# Allegro board PositionDecion_ZM_V1.brd
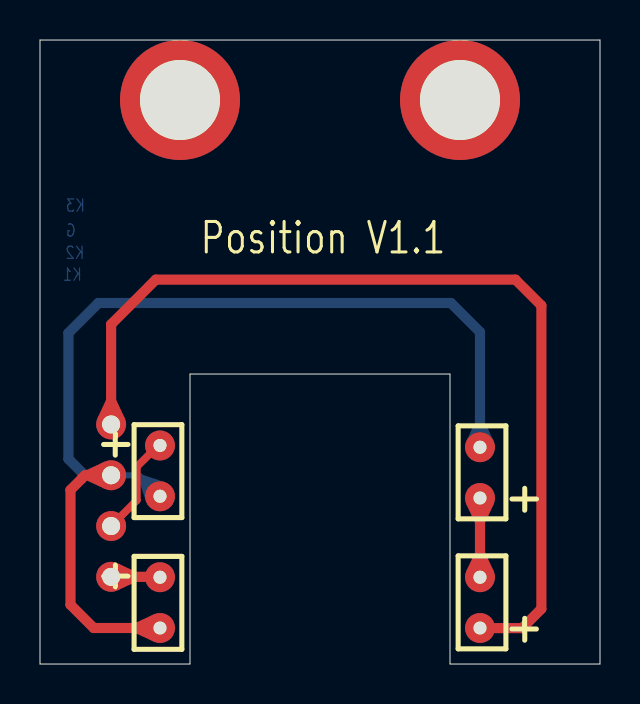
[diagram p0: board, top side]
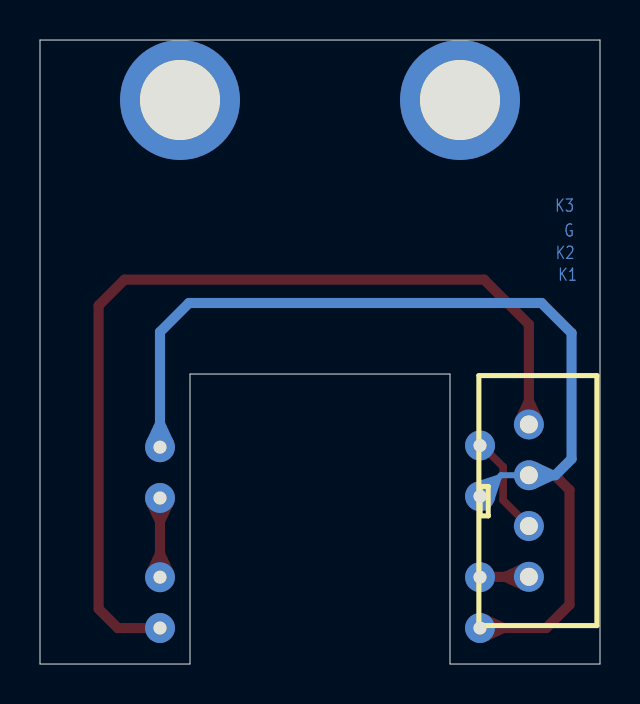
[diagram p1: board, bottom side, seen from below]

Outline 28 x 31.2 mm; copper layers: TOP, BOTTOM. Coordinates in mm from the lower left corner of the outline.
Outline path: 0,31.2 0,0 7.5,0 7.5,14.5 20.5,14.5 20.5,0 28,0 28,31.2 0,31.2

## Placement (name value [footprint] x y rotation side)
J1  -  [XH_2_54_4P]  3.56 4.36 90 bottom
Q1  .10  [LED_2_54]  22 1.8 90 top
Q2  .10  [LED_2_54]  6 10.93 270 top
Q3  .10  [LED_2_54]  22 8.3 90 top
Q4  .10  [LED_2_54]  6 4.34 270 top
Q5  -  [M4]  7 28.2 0 top
Q6  -  [M4]  21 28.2 0 top

## Library data of the parts
J1 = CON4
Q1 Q3 = IR928-6C-F
Q2 Q4 = QT523C-EE1
Q5 Q6 = M4

## Footprints (pads in the part's own frame, mm; a bottom-side part is the same pattern mirrored in y, then rotated)
LED_2_54
  round 1.5 hole 0.65: 1(0,0) 2(2.54,0)
M4
  round 6 hole 4 unplated: (0,0)
XH_2_54_4P
  round 1.5 hole 0.9: 1(0,0) 2(2.54,0) 3(5.08,0) 4(7.62,0)

## Nets
GND: J1.3 Q2.2 Q3.2 Q4.2
$$$12107: Q1.2 Q3.1
LED_K1: J1.1 Q4.1
LED_K2: J1.2 Q2.1
LED_K3: J1.4 Q1.1

## Routing (per net, layer and track width the routed paths; a pad name or vN(x,y) marks a point on that pad's centre or on a via; arc(x,y) is an arc through that point)
GND: length 52.2
  TOP w0.508: Q4.2 2.69,1.8 1.52,2.96 1.52,8.7 2.08,9.26 2.08,9.27 2.25,9.44 J1.3
  BOTTOM w0.305: Q2.2 4.95,9.44 J1.3
  BOTTOM w0.508: Q3.2 22,16.6 20.55,18.05 2.92,18.05 1.42,16.55 1.42,10.25 2.24,9.44 J1.3
$$$12107: length 4
  TOP w0.508: Q1.2 Q3.1
LED_K1: length 2.4
  TOP w0.508: J1.1 5.74,4.36 Q4.1
LED_K2: length 5.1
  TOP w0.381: J1.2 4.84,8.19 4.84,9.86 5.91,10.93 Q2.1
LED_K3: length 46.6
  TOP w0.508: Q1.1 22.36,1.8 22.36,1.79 24.1,1.79 25.07,2.76 25.07,17.92 23.77,19.22 5.79,19.22 3.56,16.98 J1.4

## Copper pours and planes (outline as drawn; the poured copper is in the pictures)
GND on TOP (solid shape): 3.62,9.44 3.24,8.76 2.28,9.21 2.13,9.44 2.28,9.67 3.24,10.12
GND on TOP (solid shape): 6.06,1.8 5.68,1.12 4.72,1.57 4.57,1.8 4.72,2.03 5.68,2.48
GND on BOTTOM (solid shape): 4.92,9.27 4.96,9.42 5.12,9.46 6.23,9.1 6.03,8.36 5.29,8.15
GND on BOTTOM (solid shape): 3.62,9.44 3.24,8.76 2.28,9.21 2.13,9.44 2.28,9.67 3.24,10.12
GND on BOTTOM (solid shape): 21.77,12.12 22,12.27 22.23,12.12 22.68,11.16 22,10.78 21.32,11.16
$$$12107 on TOP (solid shape): 21.77,5.62 22,5.77 22.23,5.62 22.68,4.66 22,4.28 21.32,4.66
$$$12107 on TOP (solid shape): 22.68,7.98 22.23,7.02 22,6.87 21.77,7.02 21.32,7.98 22,8.36
LED_K1 on TOP (solid shape): 4.84,4.59 4.98,4.36 4.84,4.13 3.87,3.68 3.49,4.36 3.87,5.04
LED_K3 on TOP (solid shape): 3.33,13.26 3.56,13.41 3.79,13.26 4.24,12.3 3.56,11.92 2.88,12.3

## Text on the board
BOTTOM: G | K1 | K2 | K3
Ref Des/Silkscreen Top: Position V1.1
